# Altium PCB Led sequencer.PcbDoc
Units mm, origin at the board's own origin, x right, y up, seen from the top; angles counter-clockwise.
Board outline 59 x 25 mm, 2 copper layers (Top Layer, Bottom Layer), stack 1.671 mm thick; 28 components, 26 nets, 77 pads, 26 vias.
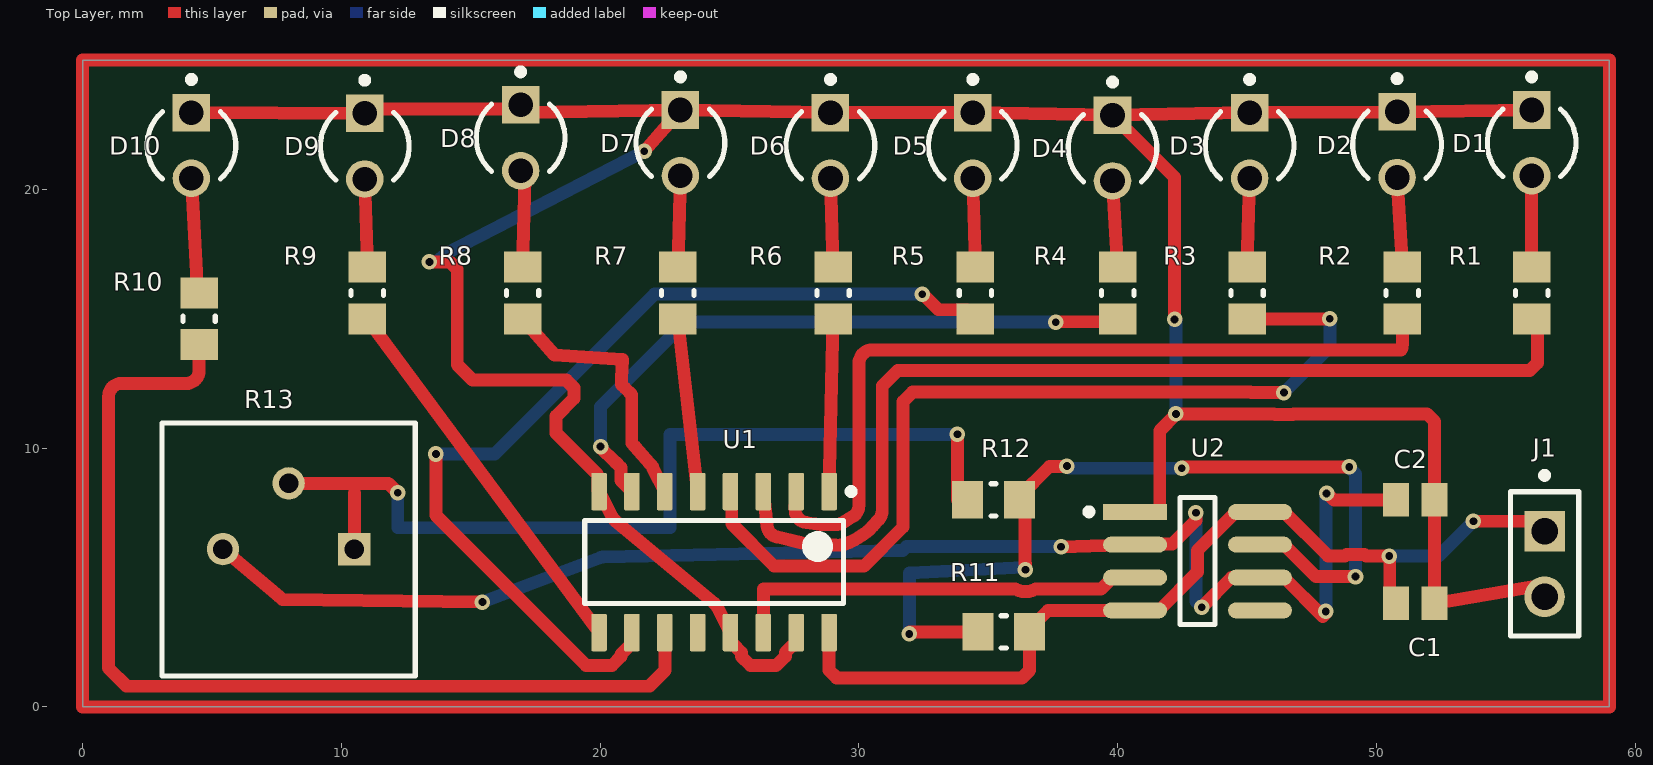
[diagram p0: Top Layer view]
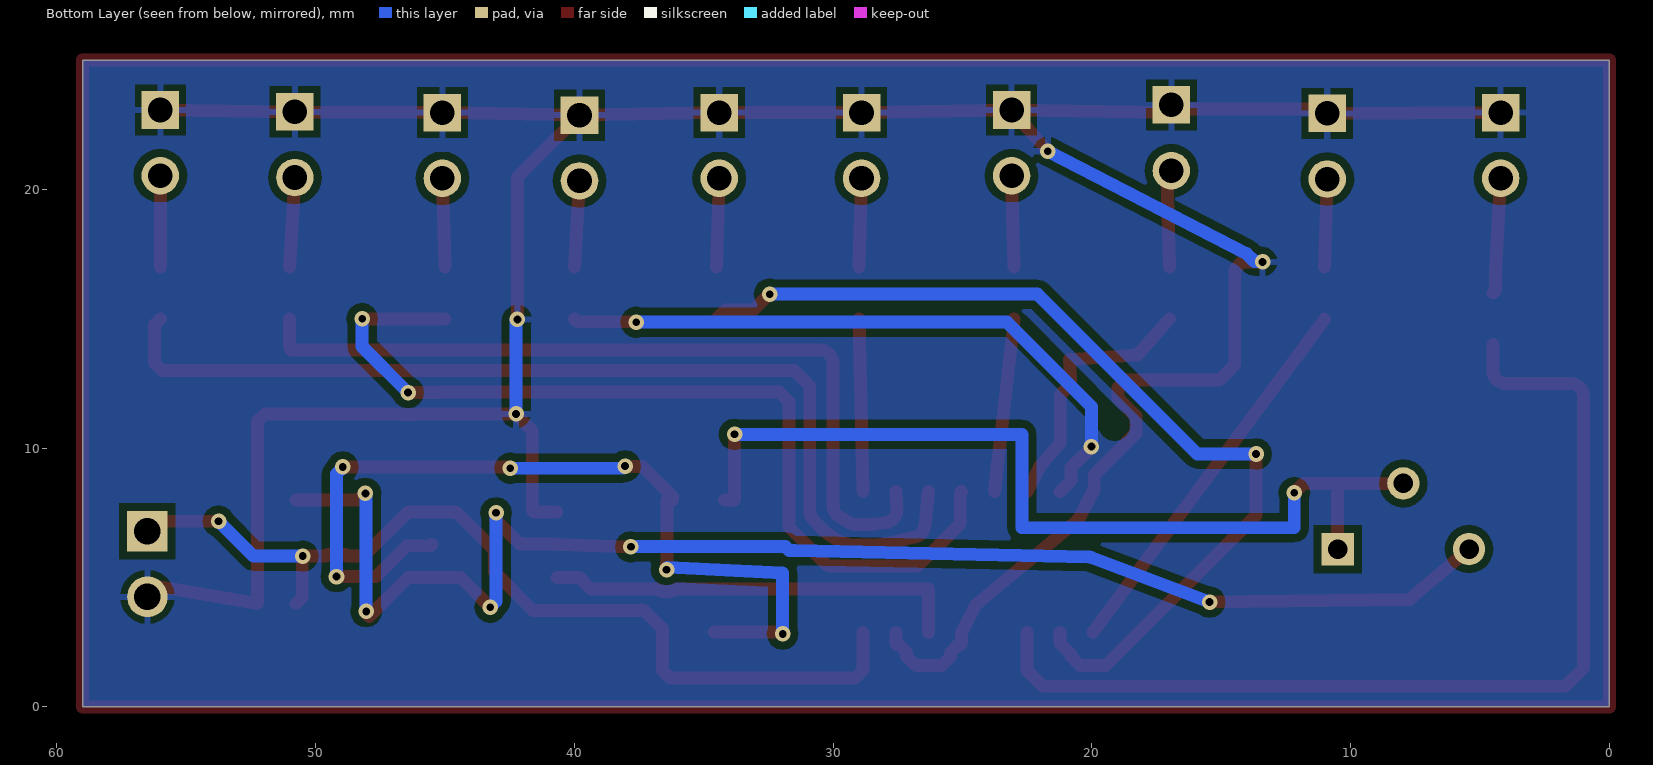
[diagram p1: Bottom Layer view, seen from below]
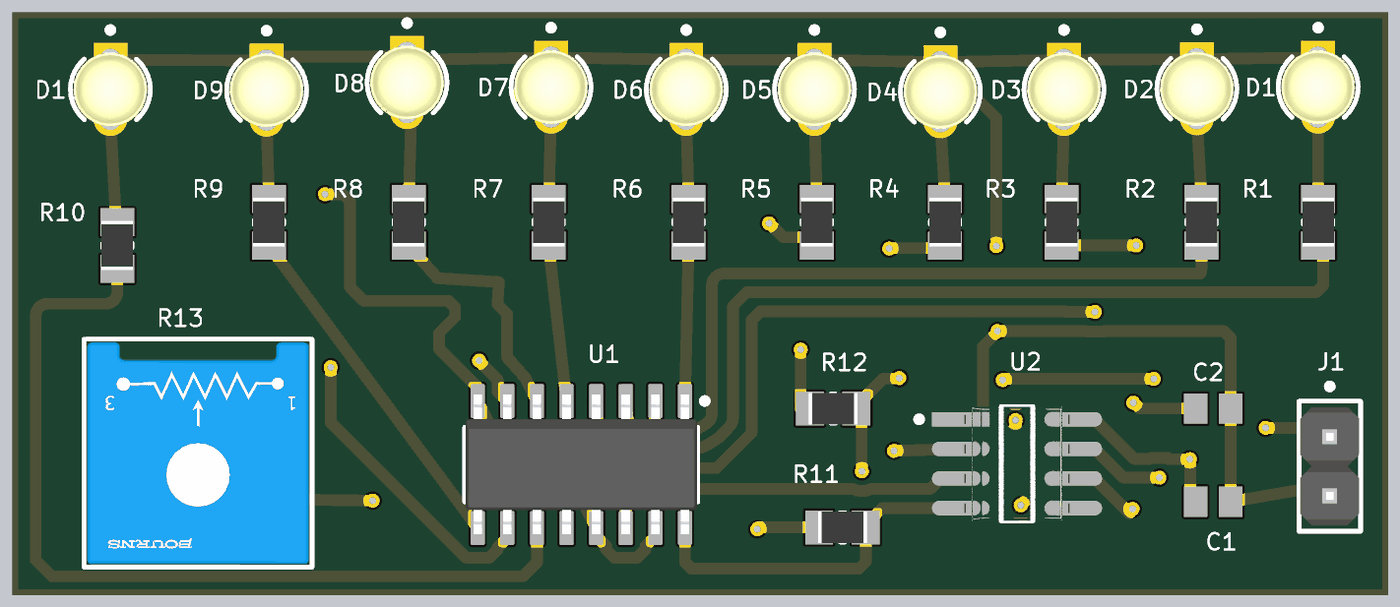
[diagram p2: 3D render of the assembled board from above, using the file's embedded part models]

## Layer stack, top to bottom
Top Solder: solder mask 0.0102, Solder Resist, Dk 3.5
Top Layer: signal copper 0.0356
Dielectric 1: dielectric 1.6, FR-4, Dk 4.8
Bottom Layer: signal copper 0.0356
Bottom Solder: solder mask 0.0102, Solder Resist, Dk 3.5

## Board outline
0,0 0,25 59,25 59,0

## Design rules (kind name [scope] priority, off if disabled: settings)
Clearance [All] p1: gap=0.3 ignorepadtopadclearanceinfootprint=FALSE
PolygonConnect [All] p1: connectstyle=Relief reliefconductorwidth=0.254 reliefentries=4 polygonreliefangle="90 Angle" airgapwidth=0.254
RoutingVias [All] p1: holewidth=0.3 width=0.6 viastyle="Through Hole" minholewidth=0.3 minwidth=0.6 maxholewidth=0.3 maxwidth=0.6
SilkToSolderMaskClearance [IsPad] p1: minsilkscreentomaskgap=0.1 clearancetoexposedcopper=TRUE
SolderMaskExpansion [All] p1: expansion=0.102 istentingtop=FALSE
UnRoutedNet [All] p1: checkbadconnections=TRUE
Width [All] p1: maxlimit=1 minlimit=0.3 preferedwidth=0.5
28 further rules are at their usual default settings.

## Components (designator, comment, footprint, x,y, rotation, side; value= is the part's Value field where it differs from the comment)
C1 "1uf" CAPC2013X135X45LL10T25 51.5,4 r180 top
C2 "1uf" CAPC2013X135X45LL10T25 51.5,8 r180 top
D1 "HLMP-1719" FP-HLMP-1719-MFG 56,21.8 r270 top
D2 "HLMP-1719" FP-HLMP-1719-MFG 50.8,21.73 r270 top
D3 "HLMP-1719" FP-HLMP-1719-MFG 45.1,21.7 r270 top
D4 "HLMP-1719" FP-HLMP-1719-MFG 39.8,21.6 r270 top
D5 "HLMP-1719" FP-HLMP-1719-MFG 34.4,21.7 r270 top
D6 "HLMP-1719" FP-HLMP-1719-MFG 28.9,21.7 r270 top
D7 "HLMP-1719" FP-HLMP-1719-MFG 23.1,21.8 r270 top
D8 "HLMP-1719" FP-HLMP-1719-MFG 16.925,21.995 r270 top
D9 "HLMP-1719" FP-HLMP-1719-MFG 10.9,21.67 r270 top
D10 "HLMP-1719" FP-HLMP-1719-MFG 4.2,21.7 r270 top
J1 "M20-9990246" FP-M20-9990246-MFG 56.5,5.525 r270 top
R1 "1k" RESC2013X60X35ML10T20 56,16 r90 top
R2 "1k" RESC2013X60X35ML10T20 51,16 r90 top
R3 "1k" RESC2013X60X35ML10T20 45,16 r90 top
R4 "1k" RESC2013X60X35ML10T20 40,16 r90 top
R5 "1k" RESC2013X60X35ML10T20 34.5,16 r90 top
R6 "1k" RESC2013X60X35ML10T20 29,16 r90 top
R7 "1k" RESC2013X60X35ML10T20 23,16 r90 top
R8 "1k" RESC2013X60X35ML10T20 17,16 r90 top
R9 "1k" RESC2013X60X35ML10T20 11,16 r90 top
R10 "1k" RESC2013X60X35ML10T20 4.5,15 r90 top
R11 "2.2k" RESC2013X60X35ML10T20 35.6,2.9 r0 top
R12 "10k" RESC2013X60X35ML10T20 35.2,8 r0 top
R13 "50k" FP-3386P-MFG 7.96,6.085 r180 top
U1 "CD4017BM" D0016A_N 24.4,5.6 r270 top
U2 "NE555DR" FP-D0008A-IPC_A 43.086,5.635 r0 top

## Footprints (in the part's own frame and the unit in brackets; to place one, negate y for a bottom-side part, rotate by r counter-clockwise, add the part's x,y. Pads: shape width x height; smd on the part's side, far side on the other; paste and mask are expansions set on the pad)
CAPC2013X135X45LL10T25 [mm] "Chip Capacitor, 2-Leads, Body 2.00x1.25mm, IPC High Density"
  rect 1x1.3 smd: 1(-0.75,0) 2(0.75,0)
  body extent -1.05,-0.67 1.05,0.68, height 1.35
D0016A_N [mm] "SOIC, 16-Leads, Body 10x4mm, Pitch 1.27mm, IPC Medium Density"
  rrect17% 1.45x0.6 smd: 1(-2.725,4.445) 2(-2.725,3.175) 3(-2.725,1.905) 4(-2.725,0.635) 5(-2.725,-0.635) 6(-2.725,-1.905) 7(-2.725,-3.175) 8(-2.725,-4.445) 9(2.725,-4.445) 10(2.725,-3.175) 11(2.725,-1.905) 12(2.725,-0.635) 13(2.725,0.635) 14(2.725,1.905) 15(2.725,3.175) 16(2.725,4.445)
  silkscreen extent -2.85,-5 1.6,5.42, body extent -3,-4.95 3,4.95, height 1.59
FP-3386P-MFG [mm]
  rect 1.25x1.25 hole 0.75 paste-1000 mask+0: 1(-2.54,-0.015)
  round 1.25 hole 0.75 paste-1000 mask+0: 2(0,-2.555) 3(2.54,-0.015)
  silkscreen extent -4.89,-4.89 4.89,4.89, body extent -4.99,-4.99 4.99,4.99, height 0.25
FP-D0008A-IPC_A [mm]
  rect 2.469x0.622 smd paste+0 mask+0: 1(-2.414,1.905)
  rrect100% 2.469x0.622 smd paste+0 mask+0: 2(-2.414,0.635) 3(-2.414,-0.635) 4(-2.414,-1.905) 5(2.414,-1.905) 6(2.414,-0.635) 7(2.414,0.635) 8(2.414,1.905)
  silkscreen extent -4.32,-2.45 0.68,2.45, body extent -4.15,-2.95 4.15,2.95, height 0.25
FP-HLMP-1719-MFG [mm]
  rect 1.45x1.45 hole 0.95 paste-1000 mask+0: 1(-1.27,0)
  round 1.45 hole 0.95 paste-1000 mask+0: 2(1.27,0)
  silkscreen extent -2.67,-1.71 1.3,1.71, body extent -2.22,-2.22 2.22,2.22, height 0.25
FP-M20-9990246-MFG [mm]
  rect 1.57x1.57 hole 1.02 paste-1000 mask+0: 1(-1.27,0)
  round 1.57 hole 1.02 paste-1000 mask+0: 2(1.27,0)
  silkscreen extent -3.55,-1.32 2.79,1.32, body extent -2.89,-1.42 2.89,1.42, height 0.25
RESC2013X60X35ML10T20 [mm] "Chip Resistor, 2-Leads, Body 2.1x1.35mm, IPC Low Density"
  rect 1.2x1.45 smd: 1(-1,0) 2(1,0)
  silkscreen extent -0.1,-0.63 0.1,0.63, body extent -1.05,-0.68 1.05,0.67, height 0.6

## Part data
C1 C2: library part CMP-1036-04761-2, Manufacturer=Murata, Part Number=GRM21BR71H105KA12L
D1 D2 D3 D4 D5 D6 D7 D8 D9 D10: library part CMP-2000-06410-2, "LED YELLOW DIFFUSED T-1 T/H", Colour=Yellow, Forward Current=2mA, Forward Voltage=1.8V, Manufacturer=Broadcom, Package=0, Power Dissipation=17.5mW, Reverse Voltage=5V, Temperature="-40°C to +100°C", Temperature Range High=+100°C, Temperature Range Low=-40°C, Automotive=No, Category=Diode, ComponentLink2Description=Datasheet, ComponentLink2URL=https://docs.broadcom.com/docs/AV02-1557EN, Device Class L1=Optoelectronics, Device Class L2=LEDs, Device Class L3=unset, Digikey Description="LED YELLOW DIFFUSED T-1 T/H", Lead Free=Yes, Led Orientation=Straight, Luminous Intensity=2.1mcd, Manufacturer Part Number=HLMP-1719, Mouser Description="Standard LEDs - Through Hole Yellow Diffused 585nm 2.1mcd", Octopart=https://octopart.com/hlmp-1719-broadcom-71130405, RoHS=TRUE, Viewing Angle=50°, Wavelength=585nm
J1: library part CMP-15831-000009-1, "CONN HEADER VERT 2POS 2.54MM", Current Rating=3A, Manufacturer=Harwin, Temperature="-40°C to +105°C", Temperature Range High=+105°C, Temperature Range Low=-40°C, Automotive=No, Category=Conn, ComponentLink2Description=Datasheet, ComponentLink2URL=https://cdn.harwin.com/pdfs/M20-999.pdf, Conn Gender=Male, Conn Orientation=Vertical, Contact Material=Tin,Nickel, Device Class L1=Connectors, Device Class L2="Headers and Wire Housings", Device Class L3=unset, Digikey Description="CONN HEADER VERT 2POS 2.54MM", Height=8.99mm, Lead Free=Yes, Manufacturer Part Number=M20-9990246, Mouser Description="2.54mm (0.1\") Pitch SIL Vertical PC Tail Pin Header, 6.1mm mating pin height, tin, 2 contacts", Number of Contacts=2, Number of Rows=1, Octopart=https://octopart.com/m20-9990246-harwin-2590635, Package=M20-9990246, Pitch=2.54mm, RoHS=TRUE
R1 R2 R3 R4 R5 R6 R7 R8 R9 R10 R11 R12: library part CMP-2100-03671-1, "Chip Resistor, 1 KOhm, +/- 1%, 125 mW, -55 to 155 degC, 0805 (2012 Metric), RoHS, Tape and Reel", Case Code (Imperial)=0805, Case Code (Metric)=2012, Manufacturer=Yageo, Max Operating Temperature=155degC, Max Power Dissipation=125mW, Min Operating Temperature=-55degC, Package Description="2-Pin Surface Mounted Device, Body 2 x 1.25 mm", Package Quantity=1, Resistance=1KOhm, Temperature Coefficient=100ppm/degreesC, Tolerance=1%, Voltage Rating=150V, Case/Package=0805, Composition=ThickFilm, Datasheet URL=http://www.yageo.com/NewPortal/yageodocoutput?fileName=/pdf/R-Chip/PYu-RC_Group_51_RoHS_L_5.pdf, Datasheet Version="Rev. 5, 10/2016", Depth=1.25mm, Height=0.024inch, Lead Free=LeadFree, Length=0.079inch, Manufacturer URL=http://www.yageo.com/, Military Standard=Not, Number of Pins=2, Number of Terminations=2, Package Reference=0805, Packaging=TapeandReel, Power Rating=125mW, REACH SVHC=Unknown, RoHSCompliant=true, Termination=SMD/SMT, Voltage Rating (DC)=150V, Width=0.049inch
R13: library part CMP-2000-05592-8, "TRIMMER 100K OHM 0.5W PC PIN TOP", Color=Blue, Manufacturer Series=3386, Max Operating Temperature=125°C, Max Power Dissipation=500mW, Min Operating Temperature=-55°C, Package Quantity=100, Resistance=100kR, Resistance Law=Linear, Resistance Tolerance=10%, Resistor Type=Cermet, Temperature Coefficient=100ppm/°C, Voltage Rating=300V, Actuator Orientation=Vertical, Actuator Type=SCREW, Contact Plating=Tin, Depth=9.53mm, Height=4.83mm, Lead Free="Contains Lead", Length=9.53mm, Military Standard=Not, Mount="Through Hole", Number of Pins=3, Number of Terminals/Pins=3, Number of Turns=1, Packaging=Rail/Tube, Power Rating=500mW, Radiation Hardening=No, Reach SVHC Compliant=Yes, RoHS Compliant=Yes, Series="Trimpot® 3386 - Sealed", Taper=Linear, Technology=CERMET, Terminal Finish=Tin, Termination=Pin, Tolerance=10%, Type=Potentiometer, Weight=0.03oz, Width=9.53mm
U1: library part CMP-1623-00071-2, "CMOS Decade Counter with 10 Decoded Outputs, D0016A, TUBE", F @ Nom Voltage(Max)(Mhz)=8, Generic Part Number=CD4017B, ICC @ Nom Voltage(Max)(mA)=0.03, Manufacturer="Texas Instruments", Operating Temperature Range(C)="-55 to 125", Rating=Military, tpd @ Nom Voltage(Max)(ns)=270, Voltage(Nom)(V)=10, Bits(#)=10, Code_JEDEC="MS-012 variation AC", DatasheetVersion=SCHS027C, Function=Counter, Input Type=CMOS, Inputs=1, Output Drive (IOL/IOH)(Max)(mA)=1.5/-1.5, Output Type=CMOS, PackageReference=D0016A, Schmitt Trigger=No, Technology Family=CD4000, Type=Decade, VCC(Max)(V)=18, VCC(Min)(V)=3
U2: library part CMP-1685-00007-2, "IC OSC SGL TIMER 100KHZ 8-SOIC", Case/Package=SOIC, Frequency=100kHz, High Level Output Current=-200mA, Low Level Output Current=200mA, Max Operating Temperature=70°C, Max Supply Voltage=16V, Min Operating Temperature=0°C, Min Supply Voltage=4.5V, Operating Supply Current=10mA, Package Quantity=2500, Quiescent Current=15mA, Contact Plating=Gold, Height=1.58mm, Lead Free="Lead Free", Length=4.9mm, Mount="Surface Mount", Number of Pins=8, Number of Timers/Counters=1, Packaging="Tape and Reel", Radiation Hardening=No, REACH SVHC="No SVHC", Weight=0.002561oz, Width=3.91mm

## Via types
v1: diameter 0.6, hole 0.3, Top Layer to Bottom Layer, 26 vias

## Nets (pads, with @x,y where several pads share a name; then routed paths per layer and width w, separated by ;. In a path a pad name is that pad's centre, name@x,y a point inside that pad or via, vN(x,y) a via of type N, cw(c..) or ccw(c..) an arc to the next point about the centre after c; other vN are vias at no path point)
GND: C1.1 C2.1 D1.1 D2.1 D3.1 D4.1 D5.1 D6.1 D7.1 D8.1 D9.1 D10.1 J1.2 U1.8 U1.13 U1.15 U2.1 | length 129.7
  Top Layer w0.5: D10.1 D9.1 11.063,23.102 16.762,23.102 D8.1 16.925,23.145 17.1,22.97 D7.1 ; v1(13.4,17.2) 14.182,17.2 14.475,16.907 14.475,13.225 15.071,12.629 18.69,12.629 18.983,12.337 18.983,11.922 18.298,11.238 18.298,10.576 19.905,8.969 19.905,8.375 U1.8 20.441,7.377 ccw(c20.976,7.651) 20.591,7.19 24.398,4.011 cw(c24.014,3.549) 24.549,3.822 U1.13 25.035,2.45 25.085,2.4 25.162,2.4 25.455,2.107 25.455,1.952 25.807,1.6 26.803,1.6 27.155,1.952 27.155,2.107 27.448,2.4 27.525,2.4 27.575,2.45 U1.15 ; v1(21.7,21.475) D7.1 ; U2.1 41.564,7.54 41.625,7.601 41.625,10.673 42.25,11.298 v1(42.25,11.325) 46.048,11.325 46.073,11.3 46.777,11.3 46.802,11.325 51.957,11.325 52.25,11.032 C2.1 C1.1 56.421,4.716 56.5,4.637 J1.2 ; v1(42.2,14.975) 42.2,20.47 D4.1 ; D1.1 D2.1 D3.1 D4.1 ; D7.1 D6.1 D5.1 D4.1
  Bottom Layer w0.5: v1(13.4,17.2) 13.419,17.219 13.719,17.219 14.019,17.519 v1(21.7,21.475) ; v1(42.2,14.975) 42.25,14.925 v1(42.25,11.325)
NetC2_2: C2.2 R13.3 U2.2 U2.6 | length 56.5
  Top Layer w0.5: R13.3 7.588,4.266 7.725,4.15 v1(15.45,4.05) ; v1(37.812,6.186) U2.2 40.696,6.293 42.109,6.293 43.025,7.21 v1(43.025,7.5) ; v1(43.25,3.85) 44.4,5 U2.6 46.425,5 47.925,3.5 48.044,3.619 v1(48.044,3.692) ; v1(48.075,8.25) 48.102,8.25 48.352,8 C2.2
  Bottom Layer w0.5: v1(15.45,4.05) 20.02,5.77 20.1,5.8 31.493,6.048 31.694,6.053 31.836,6.195 31.838,6.197 37.802,6.197 v1(37.812,6.186) ; v1(43.025,7.5) 43.025,4.075 v1(43.25,3.85) ; v1(48.044,3.692) 48.044,8.219 v1(48.075,8.25)
NetD1_2: D1.2 R1.2 | length 3.5
  Top Layer w0.5: R1.2 D1.2
NetD2_2: D2.2 R2.2 | length 3.5
  Top Layer w0.5: D2.2 R2.2
NetD3_2: D3.2 R3.2 | length 3.4
  Top Layer w0.5: R3.2 D3.2
NetD4_2: D4.2 R4.2 | length 3.3
  Top Layer w0.5: D4.2 R4.2
NetD5_2: D5.2 R5.2 | length 3.4
  Top Layer w0.5: D5.2 R5.2
NetD6_2: D6.2 R6.2 | length 3.4
  Top Layer w0.5: D6.2 R6.2
NetD7_2: D7.2 R7.2 | length 3.5
  Top Layer w0.5: R7.2 D7.2
NetD8_2: D8.2 R8.2 | length 3.8
  Top Layer w0.5: D8.2 16.925,20.605 17.1,20.43 R8.2
NetD9_2: D9.2 R9.2 | length 3.4
  Top Layer w0.5: D9.2 R9.2
NetD10_2: D10.2 R10.2 | length 4.5
  Top Layer w0.5: D10.2 4.4,16.8 4.4,16.1 R10.2
NetR1_1: R1.1 U1.3 | length 38.9
  Top Layer w0.5: U1.3 26.446,7.006 ; 26.446,7.005 ccw(c26.943,7.059) 26.825,6.573 27.729,6.354 ccw(c28.036,7.617) 27.878,6.327 28.431,6.26 ccw(c28.596,7.651) 28.596,6.25 29.094,6.25 ccw(c29.094,7.651) 29.824,6.455 30.179,6.672 ccw(c29.5,7.781) 30.515,6.969 cw(c30.906,6.656) 30.537,6.994 30.769,7.247 ccw(c30.4,7.585) 30.9,7.585 30.9,12.4 31.5,13 55.926,13 56.219,13.293 56.219,14.781 R1.1
NetR2_1: R2.1 U1.2 | length 31.8
  Top Layer w0.5: U1.2@27.536,7.644 ccw(c28.036,7.617) 27.976,7.121 28.524,7.054 ccw(c28.596,7.651) 28.596,7.05 29.094,7.05 ccw(c29.094,7.651) 29.407,7.138 29.761,7.354 ; U1.2@27.537,7.645 U1.2 ; 29.761,7.354 ccw(c29.5,7.781) 30,7.781 30,13.275 cw(c30.525,13.275) 30.525,13.8 50.958,13.8 ccw(c50.5,14) 51,14 R2.1
NetR3_1: R3.1 U1.4 | length 35.7
  Top Layer w0.5: U1.4 25.085,8.275 25.085,7.079 26.714,5.45 30.2,5.45 31.7,6.95 31.7,11.8 32.075,12.175 45.125,12.175 45.15,12.15 v1(46.425,12.15) ; R3.1 v1(48.2,15)
  Bottom Layer w0.5: v1(46.425,12.15) 48.2,13.925 v1(48.2,15)
NetR4_1: R4.1 U1.7 | length 25.2
  Top Layer w0.5: v1@19.993,10.04 20.594,9.458 cw(c20.247,9.098) 20.598,9.455 20.599,9.454 20.805,9.248 20.805,8.745 U1.7 ; v1@19.993,10.041 v1(20.014,10.062) ; v1(37.606,14.868) 37.625,14.887 39.887,14.887 R4.1
  Bottom Layer w0.5: v1(20.014,10.062) 20.014,11.602 23.28,14.868 v1(37.606,14.868)
NetR5_1: R5.1 U1.10 | length 37
  Top Layer w0.5: v1(13.65,9.775) 13.65,7.407 19.457,1.6 20.453,1.6 20.806,1.954 20.806,2.031 21.225,2.45 U1.10 ; v1(32.449,15.952) 32.476,15.952 33.079,15.35 34.15,15.35 R5.1
  Bottom Layer w0.5: v1(13.65,9.775) 15.925,9.775 22.102,15.952 v1(32.449,15.952)
NetR6_1: R6.1 U1.1 | length 6.7
  Top Layer w0.5: U1.1 R6.1
NetR7_1: R7.1 U1.5 | length 6.7
  Top Layer w0.5: R7.1 U1.5
NetR8_1: R8.1 U1.6 | length 10.2
  Top Layer w0.5: R8.1 18.231,13.599 20.863,13.429 20.817,12.708 20.817,12.468 20.962,12.322 21.22,12.065 21.22,10.387 21.22,10.199 21.344,10.057 21.914,9.409 22.009,9.312 22.054,9.184 U1.6
NetR9_1: R9.1 U1.9 | length 15.1
  Top Layer w0.5: R9.1 U1.9
NetR10_1: R10.1 U1.11 | length 39.1
  Top Layer w0.5: R10.1 4.5,13 cw(c4,13) 4,12.5 1.5,12.5 ccw(c1.5,12) 1,12 1,1.5 1.7,0.8 21.899,0.8 22.499,1.4 22.499,2.871 U1.11
NetR11_1: R11.1 R12.2 U2.7 | length 34.5
  Top Layer w0.5: v1(31.948,2.822) 31.948,2.9 R11.1 ; v1(36.436,5.306) 36.436,5.353 36.435,5.354 36.435,5.54 36.425,5.55 36.425,8 R12.2 36.2,8.125 37.364,9.289 38.02,9.289 v1(38.039,9.308) ; v1(42.475,9.225) 42.502,9.225 42.552,9.275 v1(48.95,9.275) ; U2.7 45.54,6.23 46.463,6.23 47.657,5.037 v1(49.191,5.037)
  Bottom Layer w0.5: v1(31.948,2.822) 31.948,5.176 36.392,5.397 36.436,5.353 v1(36.436,5.306) ; v1(38.039,9.308) 38.122,9.225 v1(42.475,9.225) ; v1(48.95,9.275) 48.95,9.248 49.191,9.007 v1(49.191,5.037)
NetR12_1: R12.1 R13.1 R13.2 | length 36.1
  Top Layer w0.5: R13.2 11.81,8.64 v1(12.175,8.275) ; R13.1 10.5,8.275 ; v1(33.807,10.534) 33.807,8 R12.1
  Bottom Layer w0.5: v1(12.175,8.275) 12.175,6.925 22.7,6.925 22.7,10.534 v1(33.807,10.534)
NetU1_14: U1.14 U2.3 | length 16.3
  Top Layer w0.5: U1.14 26.305,4.55 36.047,4.55 ccw(c36.436,5.306) 36.825,4.55 39.354,4.55 39.688,4.884 39.688,4.906 39.782,5 U2.3
VCC: C1.2 J1.1 R11.2 U1.16 U2.4 U2.8 | length 36.7
  Top Layer w0.5: U1.16 28.845,1.418 29.138,1.125 36.307,1.125 36.6,1.418 R11.2 36.6,3.025 37.305,3.73 U2.4 41.596,3.73 43.086,5.22 43.086,6.05 44.576,7.54 U2.8 46.424,7.54 48.127,5.837 48.789,5.837 48.839,5.887 49.543,5.887 49.602,5.828 v1(50.496,5.828) 50.516,5.809 50.516,4.234 C1.2 ; v1(53.75,7.175) 56.12,7.175 J1.1
  Bottom Layer w0.5: v1(50.496,5.828) 52.403,5.828 v1(53.75,7.175)
pads on no net: U1.12 U2.5
copper on no net: | length 168
  Top Layer w0.5: 0,0 0,25 59,25 59,0 0,0

## Polygon pours and split planes (outlines as drawn)
GND on Bottom Layer "GND_L02_P000" (solid, pour order 0): 59.025,0.05 59.025,25 -0.025,25 0,11.9 0,0.025